# Altium PCB Layout.PcbDoc
Units mm, origin at the board's own origin, x right, y up, seen from the top; angles counter-clockwise.
Board outline 35.5 x 40.5 mm, 4 copper layers (Top Layer, Ground Layer, Power Layer, Bottom Layer), stack 1.591 mm thick; 58 components, 42 nets, 203 pads, 71 vias.
Unrouted connection lines stored in the file: 2.
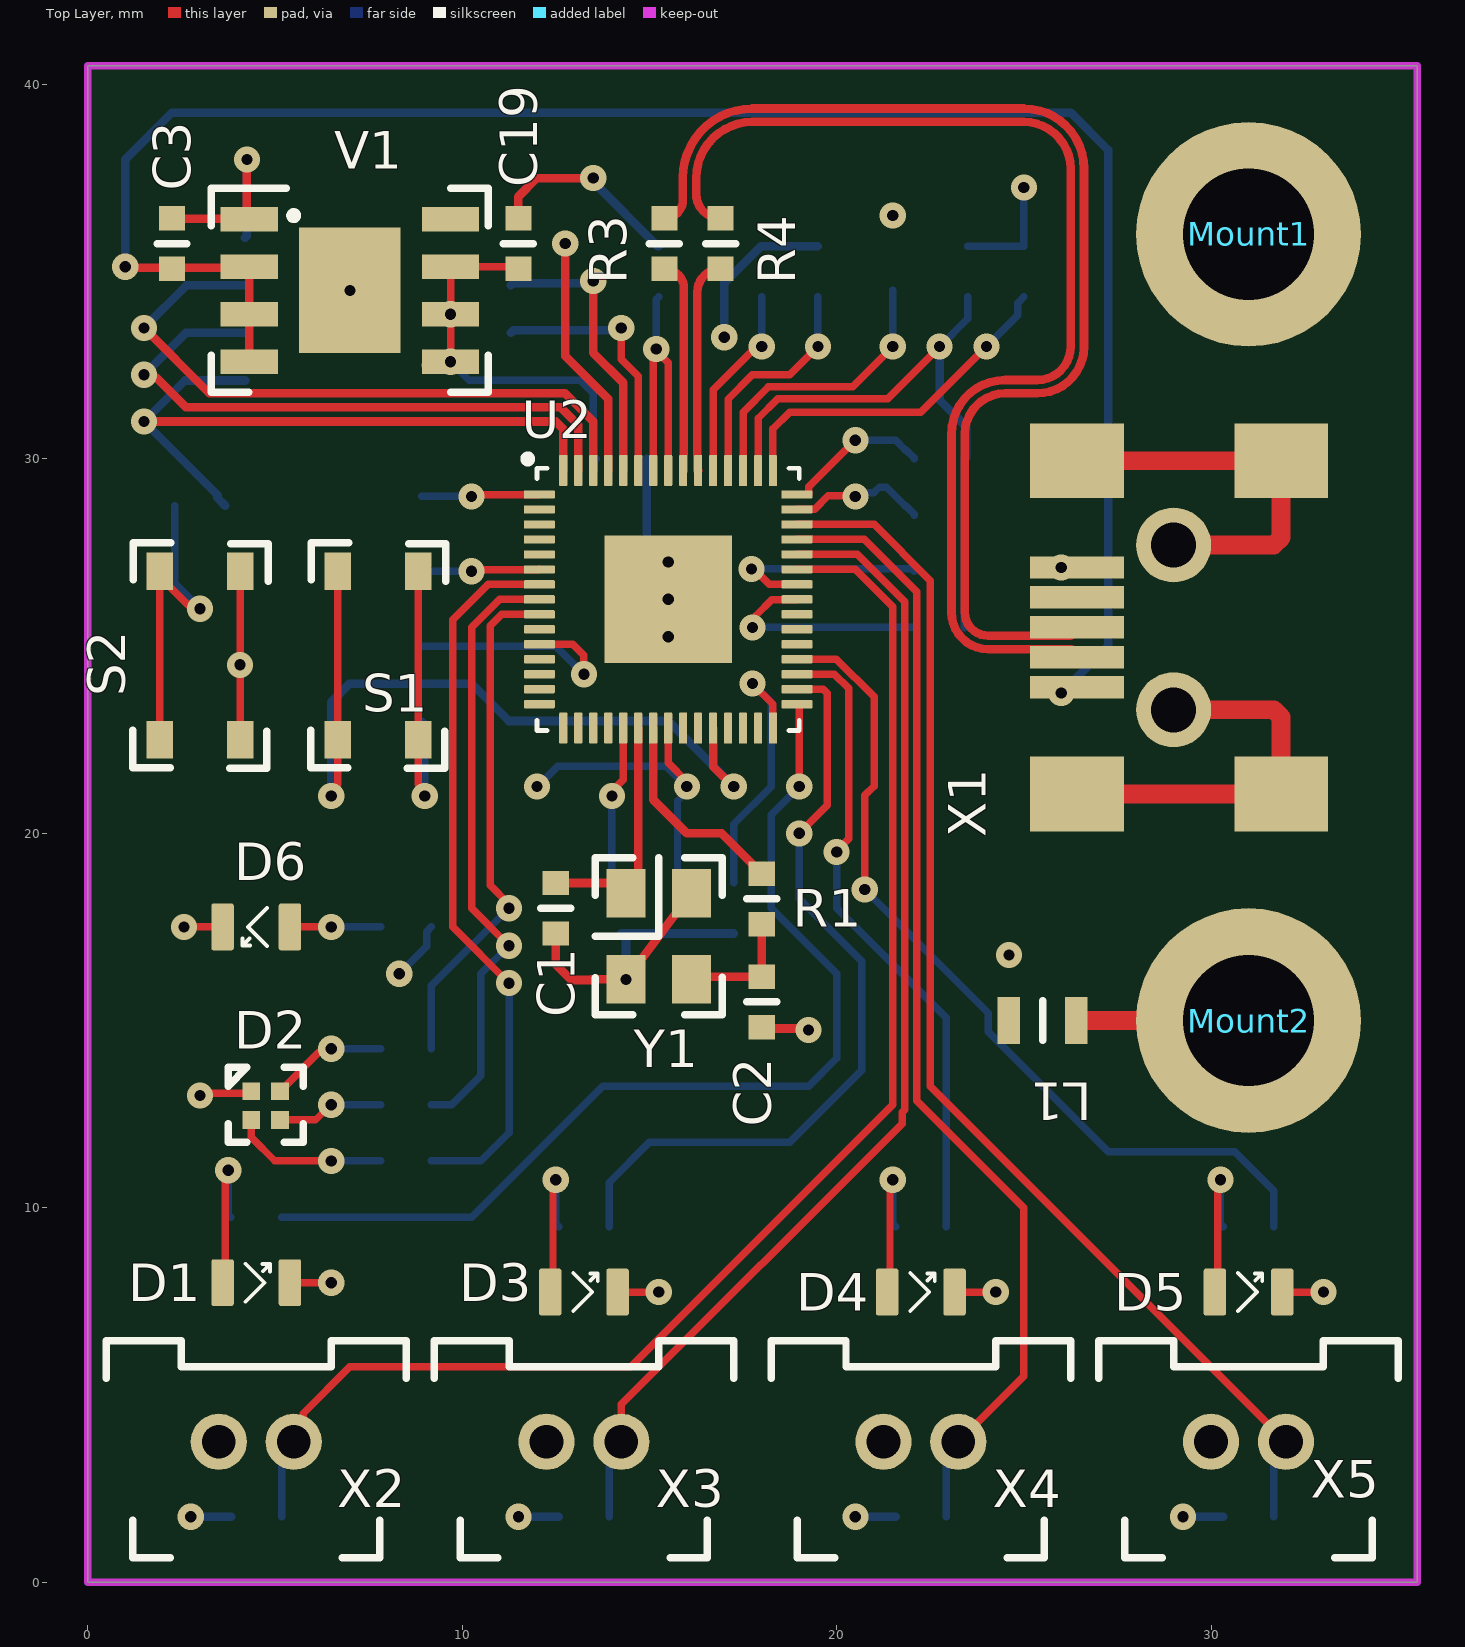
[diagram p0: Top Layer view]
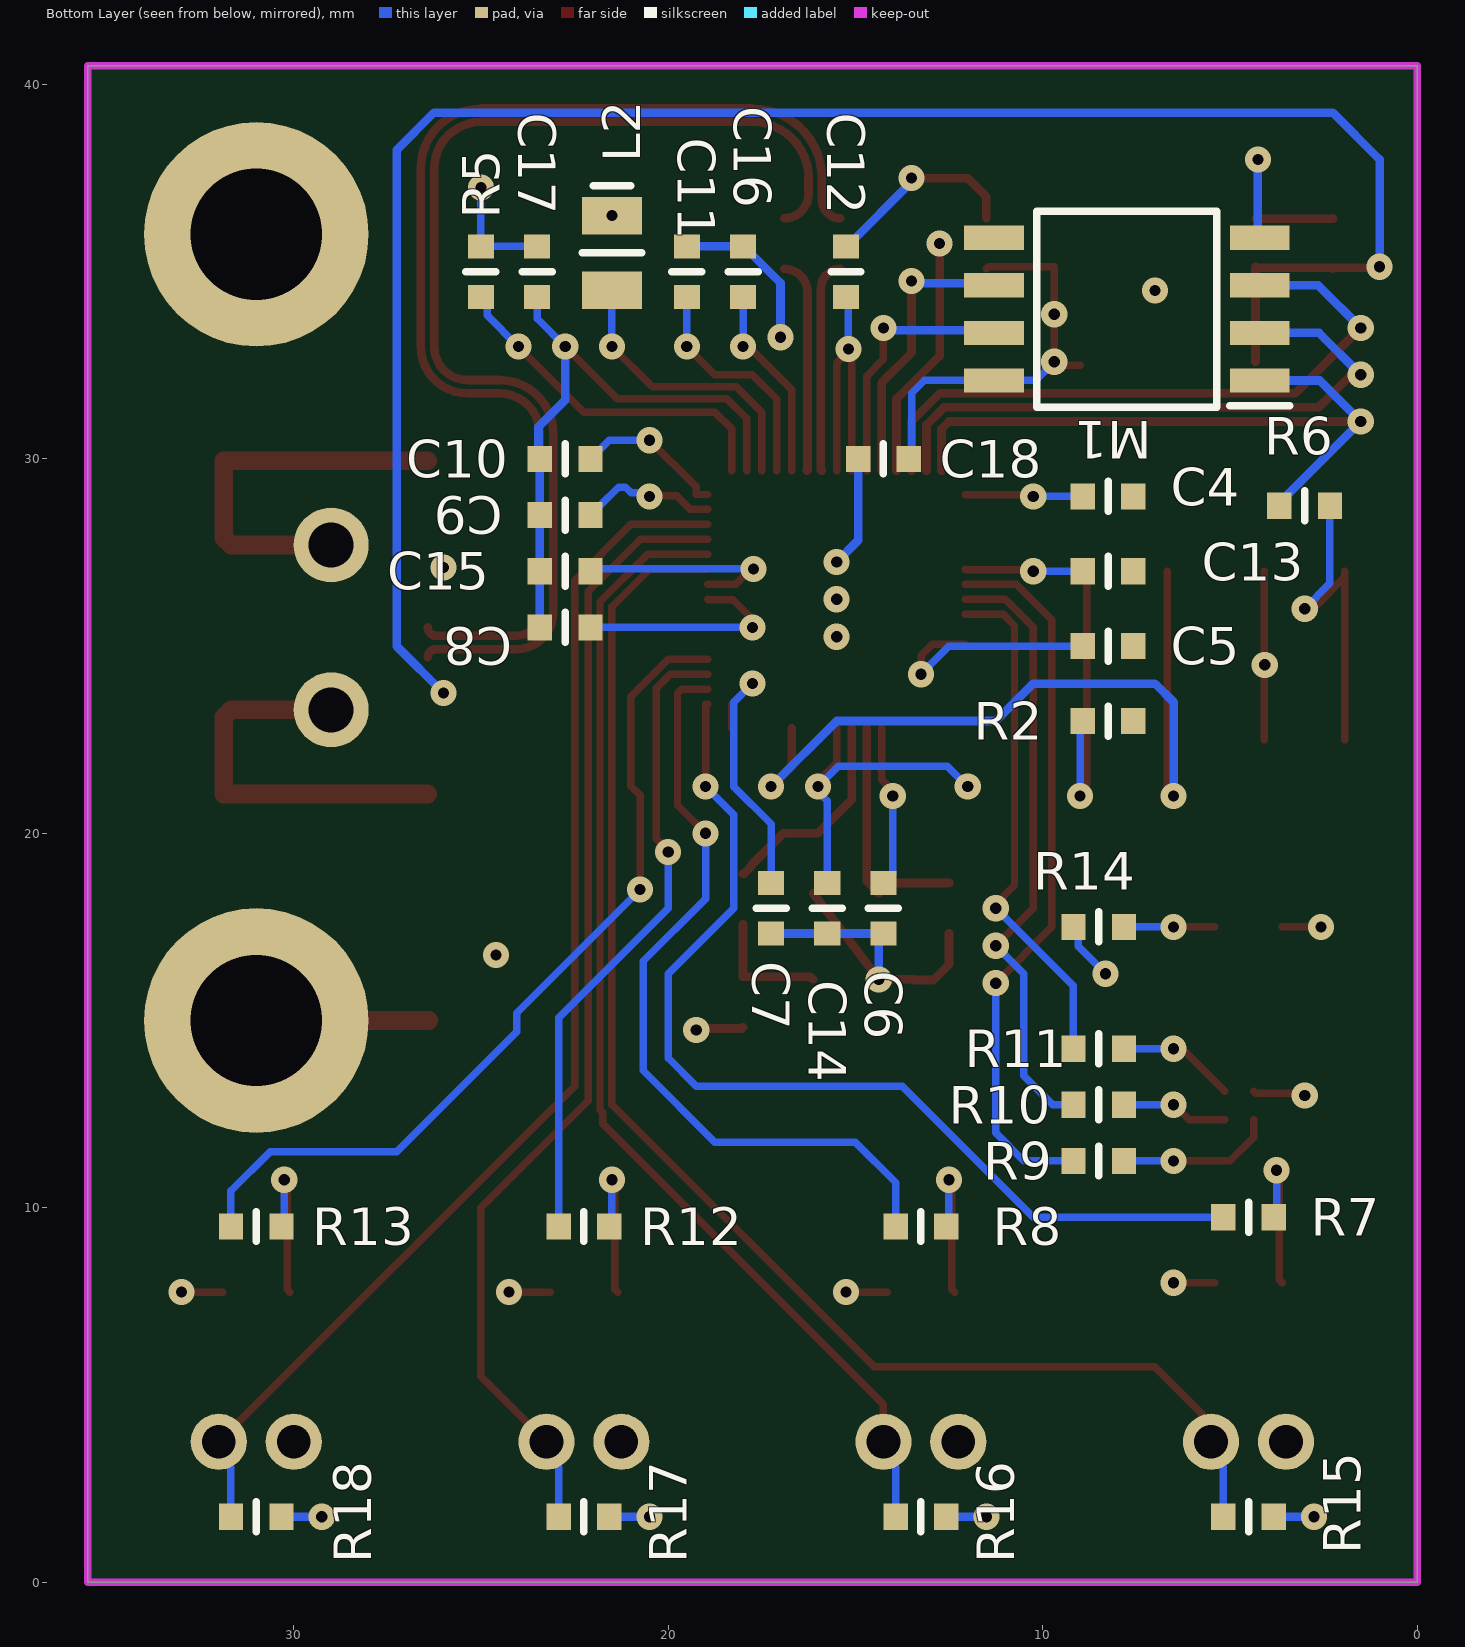
[diagram p1: Bottom Layer view, seen from below]
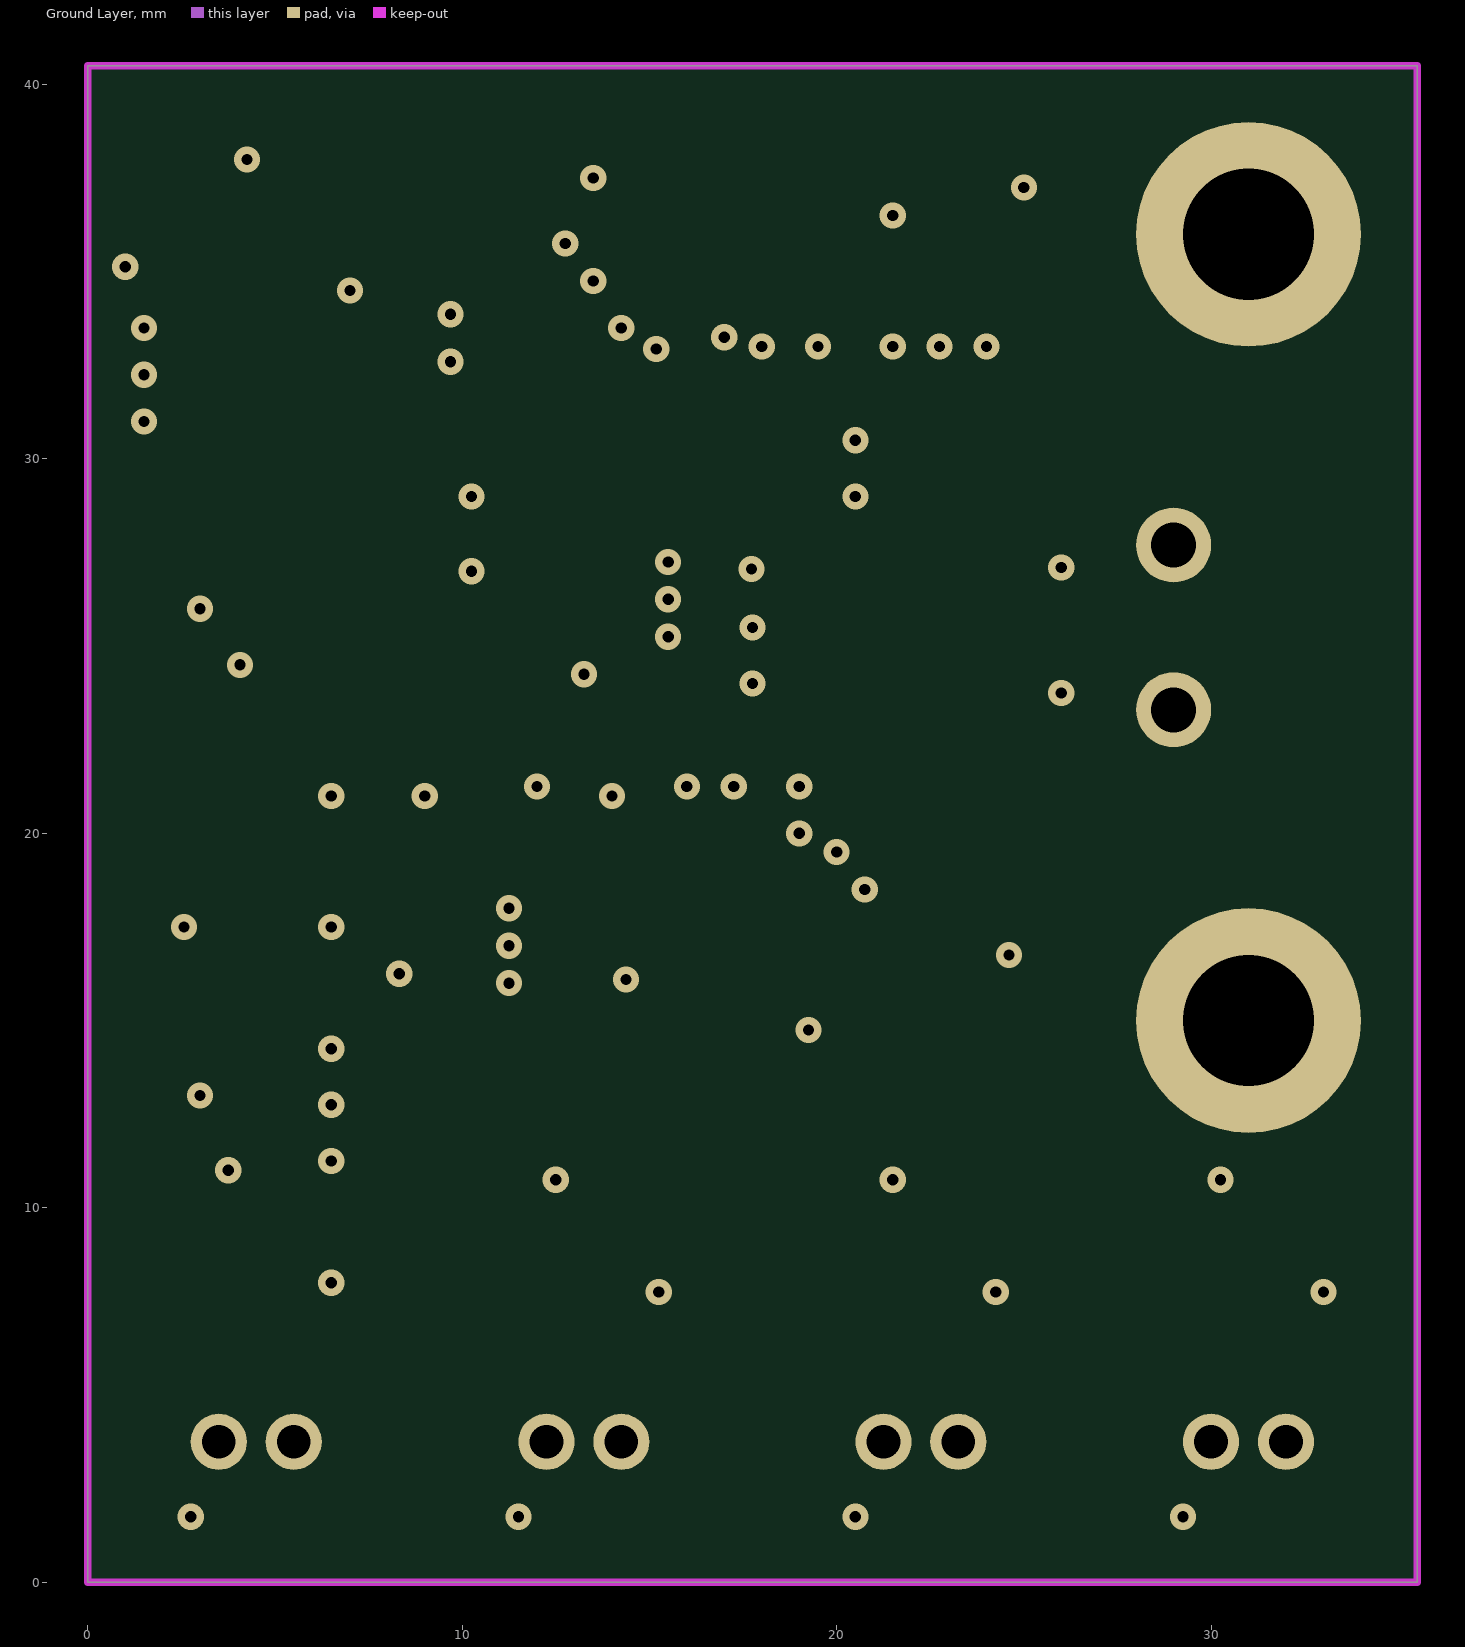
[diagram p2: Ground Layer]
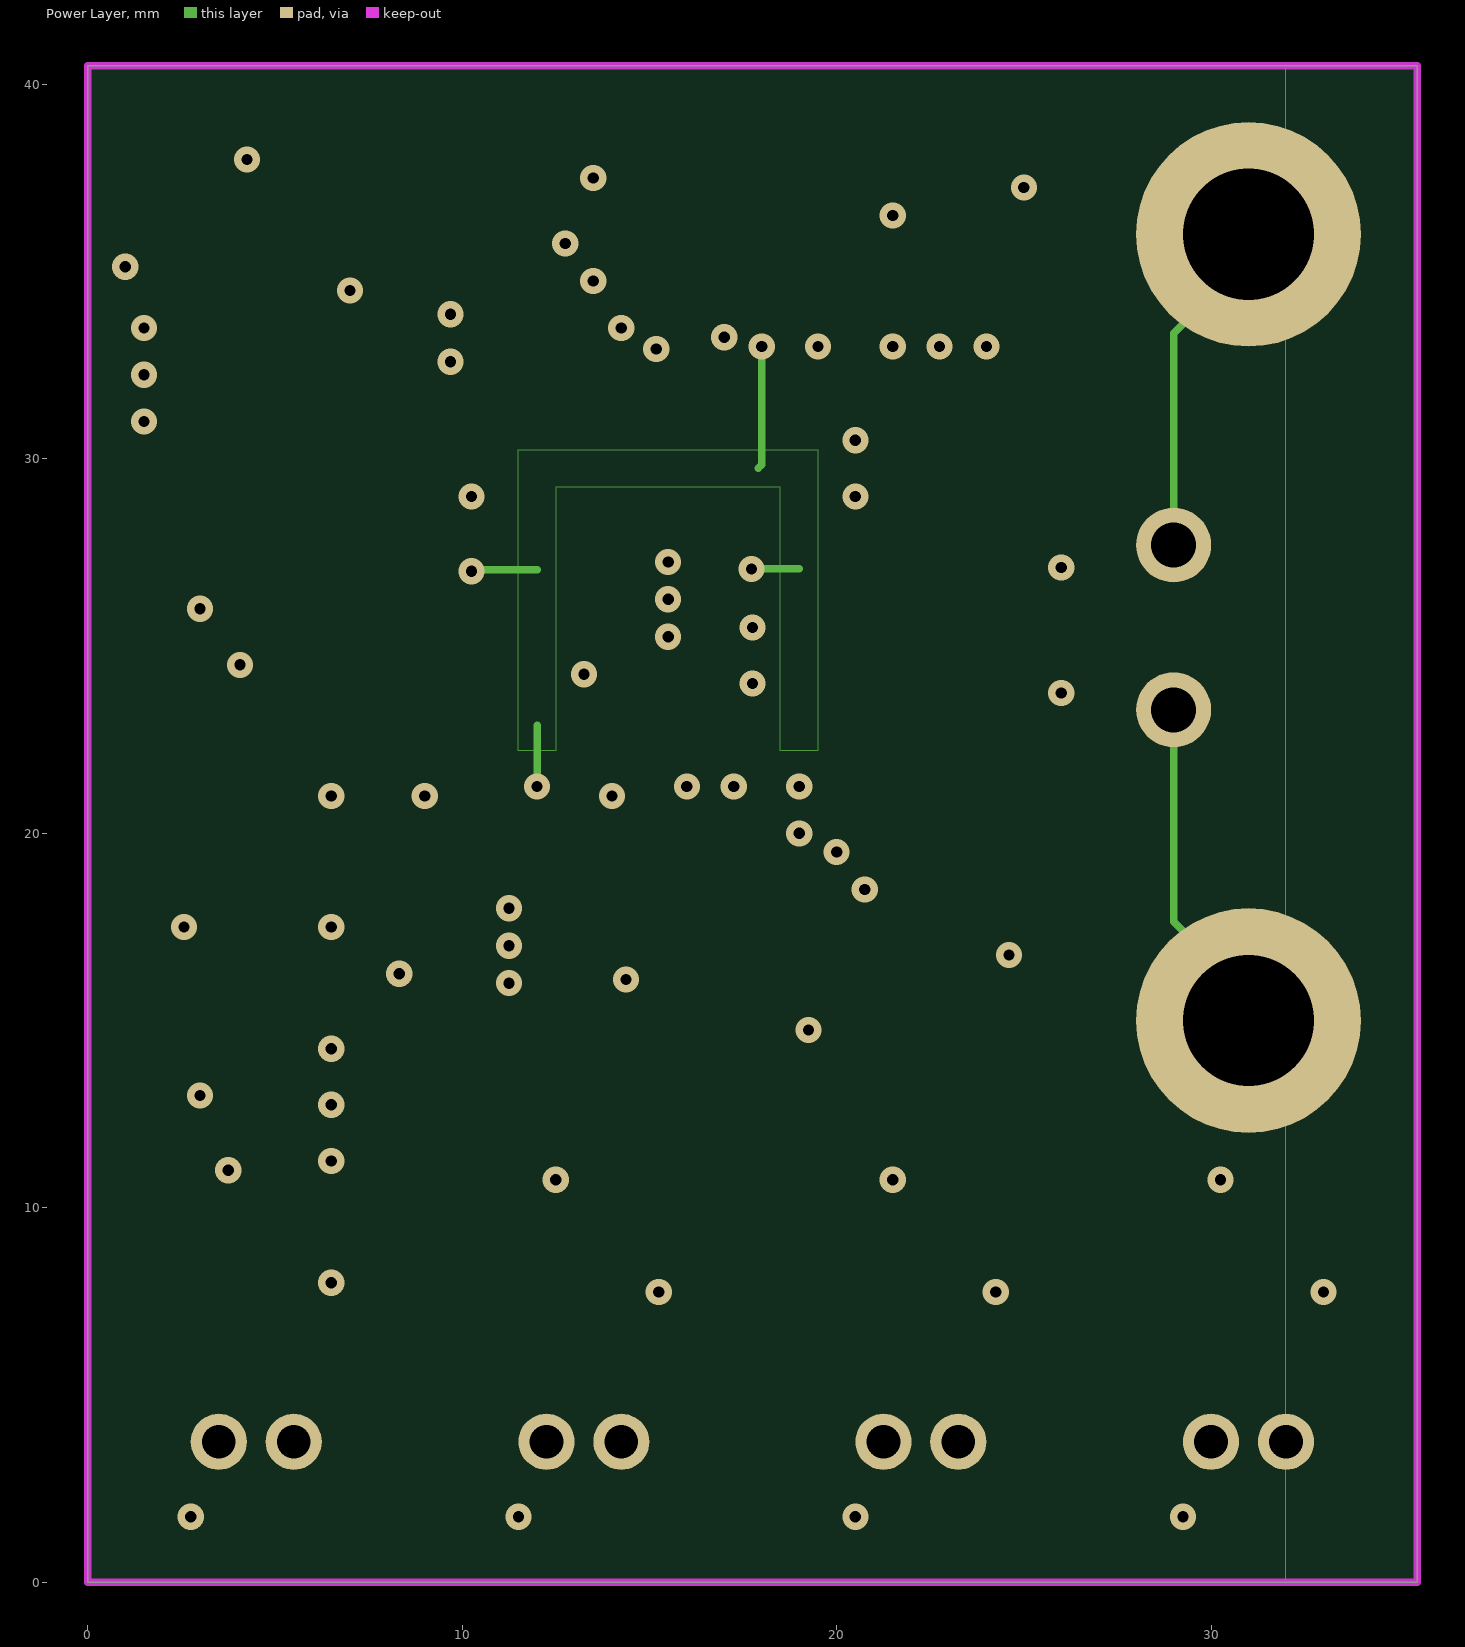
[diagram p3: Power Layer]
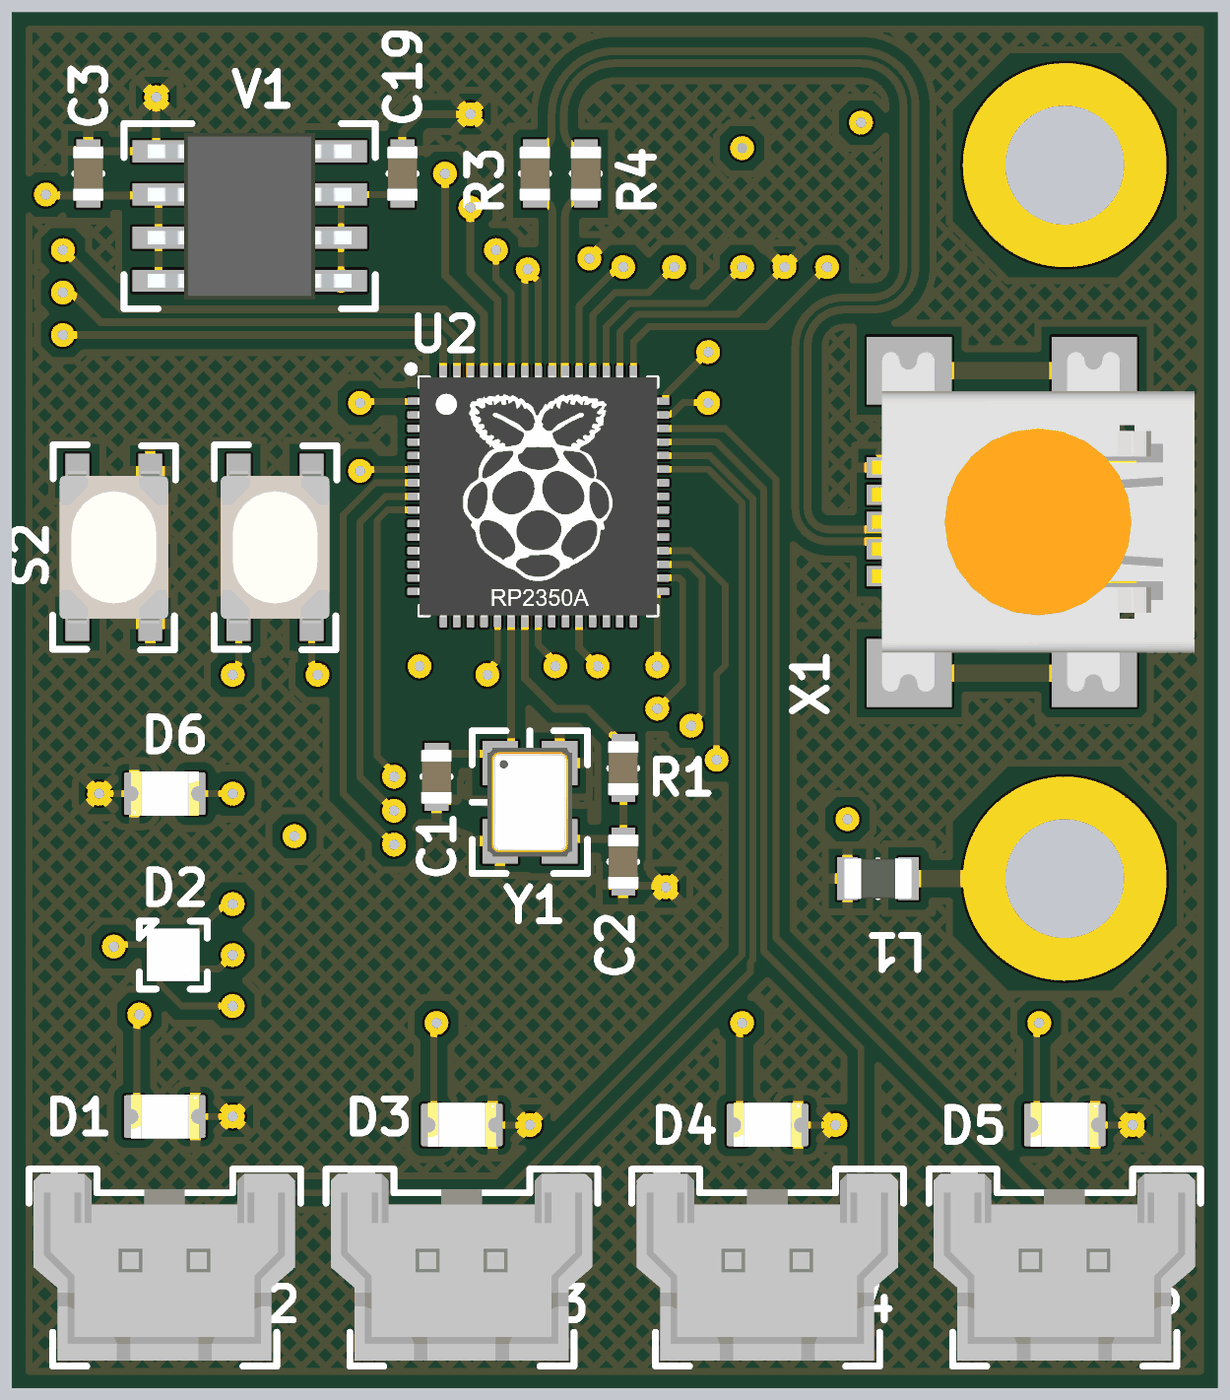
[diagram p4: 3D render of the assembled board from above, using the file's embedded part models]
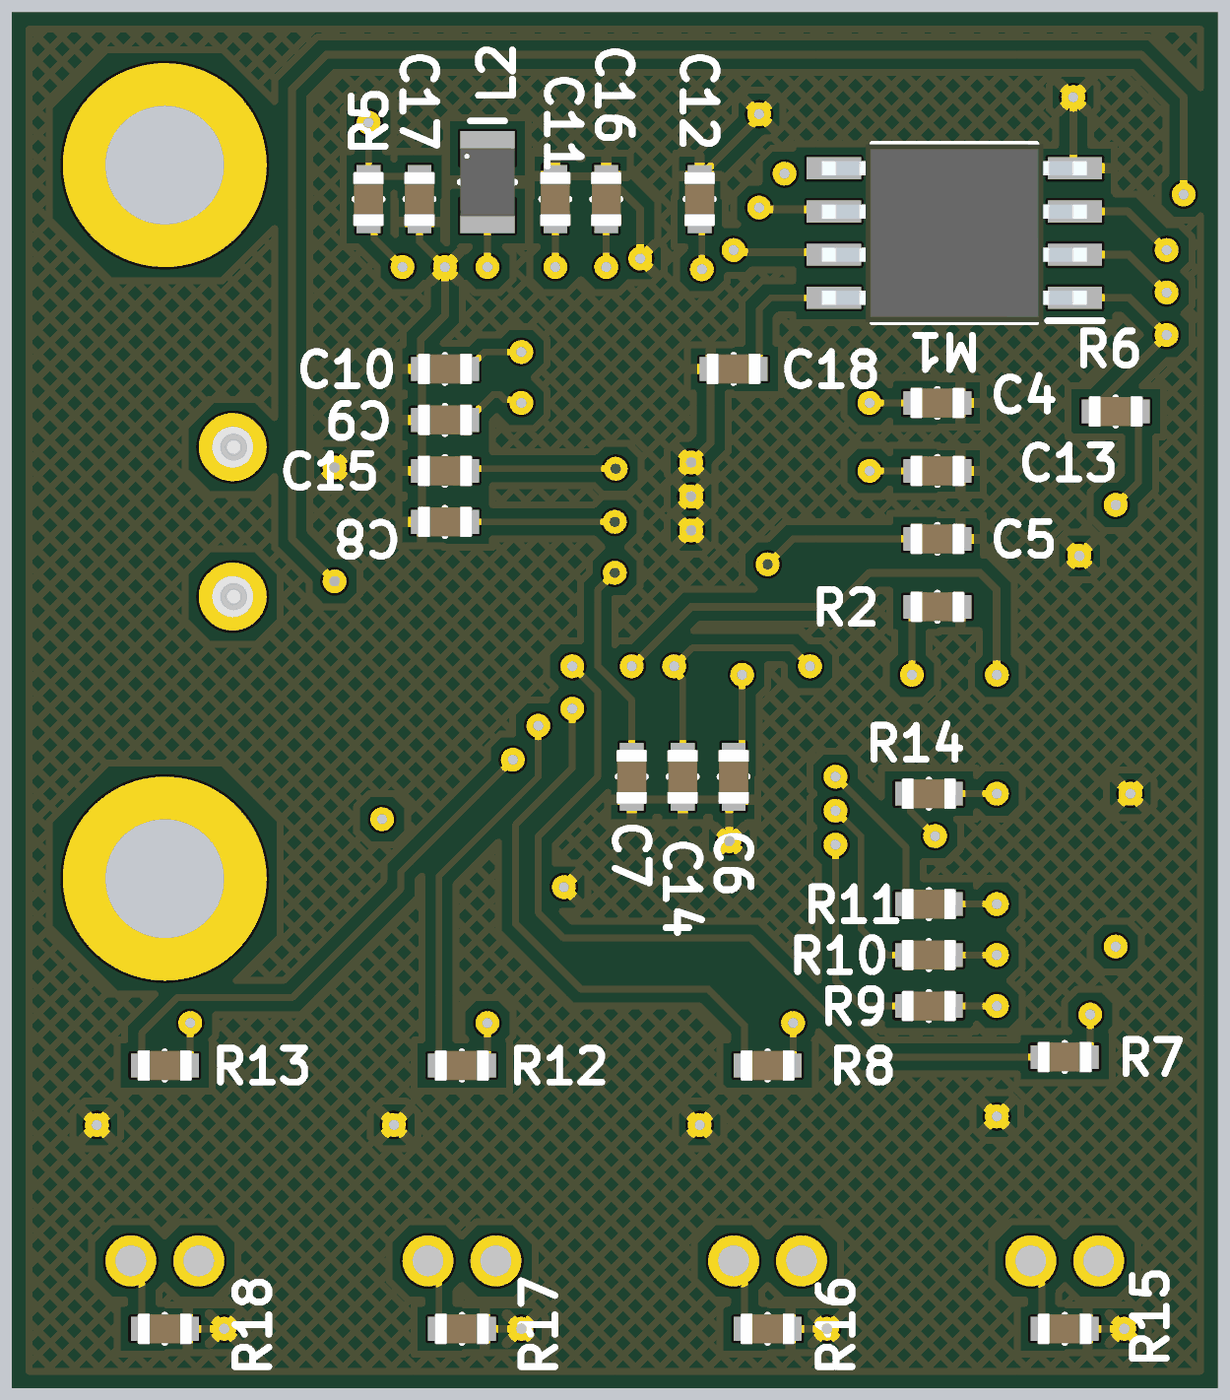
[diagram p5: 3D render of the assembled board from below, using the file's embedded part models]

## Layer stack, top to bottom
Top Solder: solder mask 0.0102, Solder Resist, Dk 3.8
Top Layer: signal copper 0.035
Dielectric 2: prepreg 0.2104, 7628*1, Dk 4.4
Ground Layer: signal copper 0.0175
Dielectric 1: dielectric 1.065, FR-4, Dk 4.8
Power Layer: signal copper 0.0175
Dielectric 3: prepreg 0.2104, 7628*1, Dk 4.4
Bottom Layer: signal copper 0.035
Bottom Solder: solder mask 0.0102, Solder Resist, Dk 3.8

## Board outline
0,0 35.5,0 35.5,40.5 0,40.5

## Design rules (kind name [scope] priority, off if disabled: settings)
BoardOutlineClearance [All] p1: gap=0.2 ignorepadtopadclearanceinfootprint=FALSE
Clearance "inPolygon Clearance" [InPolygon] p1: gap=0.3 ignorepadtopadclearanceinfootprint=TRUE // this rule ensures that every net within a polygon of a different net has a set clearance from the poly
Clearance "High Current Polygon Clearance" [(InPolygon AND InNetClass('High_Current_Nets'))] p2: gap=0 ignorepadtopadclearanceinfootprint=TRUE // this rule ensures that every net within a polygon of a different net has a set clearance from the poly
Clearance "Different Diff Pair" [All] p3: gap=0.2 ignorepadtopadclearanceinfootprint=TRUE
Clearance "Same Diff Pair" [All] p4: gap=0.1 ignorepadtopadclearanceinfootprint=TRUE
Clearance "Different Nets" [not InAnyDifferentialPair] p5: gap=0.3 ignorepadtopadclearanceinfootprint=TRUE except(0.1: Arc-SMDPad Arc-THPad Arc-Via Arc-Text Track-SMDPad Track-THPad Track-Via Track-Text SMDPad-Text THPad-Text Via-Text Fill-Text Poly-Text Region-Text Text-Text; 0.12: Arc-Arc Arc-Track Track-Track; 0.15: SMDPad-SMDPad SMDPad-THPad SMDPad-Via THPad-THPad THPad-Via Via-Via; 0.2: Arc-Hole Track-Hole SMDPad-Hole THPad-Hole Via-Hole Fill-Hole Poly-Hole Region-Hole Text-Hole)
Clearance "Same Net" [not InAnyDifferentialPair] p6: gap=0 ignorepadtopadclearanceinfootprint=TRUE except(0.1: THPad-Via; 0.18: Arc-Arc Arc-Track Track-Track)
ComponentClearance [All] p1: gap=0.102 collisioncheckmode=3 verticalgap=0.102 showdistances=TRUE
DiffPairsRouting "Ethernet Routing" [InDifferentialPairClass('Ethernet_Pairs')] p1: maxlimit=0.25 minlimit=0.2 mostfreqgap=0.25 toplayer_maxgap=0.2 toplayer_prefgap=0.2 toplayer_minwidth=0.25 toplayer_maxwidth=0.25 toplayer_prefwidth=0.25 midlayer1_mingap=0.25 midlayer1_minwidth=0.19 midlayer1_maxwidth=0.19 midlayer1_prefwidth=0.19 midlayer2_mingap=0.25 midlayer2_minwidth=0.19 midlayer2_maxwidth=0.19 midlayer2_prefwidth=0.19 bottomlayer_maxgap=0.2 bottomlayer_prefgap=0.2 bottomlayer_minwidth=0.25 bottomlayer_maxwidth=0.25 bottomlayer_prefwidth=0.25 impedanceprofiledriven=TRUE maxuncoupledlength=12.7
DiffPairsRouting "USB Routing" [InDifferentialPairClass('USB_Pairs')] p2: maxlimit=0.291 minlimit=0.127 mostfreqgap=0.291 toplayer_maxgap=0.127 toplayer_prefgap=0.127 toplayer_minwidth=0.23 toplayer_maxwidth=0.23 toplayer_prefwidth=0.23 midlayer1_mingap=0.291 midlayer1_minwidth=0.25 midlayer1_maxwidth=0.25 midlayer1_prefwidth=0.25 midlayer2_mingap=0.291 midlayer2_minwidth=0.25 midlayer2_maxwidth=0.25 midlayer2_prefwidth=0.25 bottomlayer_maxgap=0.127 bottomlayer_prefgap=0.127 bottomlayer_minwidth=0.23 bottomlayer_maxwidth=0.23 bottomlayer_prefwidth=0.23 maxuncoupledlength=12.7
DiffPairsRouting "CAN Routing" [InDifferentialPairClass('CAN_Pairs')] p3: maxlimit=0.907 minlimit=0.5 mostfreqgap=0.907 toplayer_maxgap=0.5 toplayer_prefgap=0.5 toplayer_minwidth=0.201 toplayer_maxwidth=0.201 toplayer_prefwidth=0.201 midlayer1_mingap=0.907 midlayer1_minwidth=0.155 midlayer1_maxwidth=0.155 midlayer1_prefwidth=0.155 midlayer2_mingap=0.907 midlayer2_minwidth=0.155 midlayer2_maxwidth=0.155 midlayer2_prefwidth=0.155 bottomlayer_maxgap=0.5 bottomlayer_prefgap=0.5 bottomlayer_minwidth=0.201 bottomlayer_maxwidth=0.201 bottomlayer_prefwidth=0.201 impedanceprofiledriven=TRUE maxuncoupledlength=12.7
Height [All] p1: minheight=0 maxheight=1816.048 prefheight=12.7
HoleSize [All] p1: absolutevalues=TRUE maxlimit=6.3 minlimit=0.3 maxpercent=80.000 minpercent=20.000
HoleToHoleClearance [All] p1: gap=0.25 allowstackedmicrovias=FALSE
MatchedLengths "XTAL Nets Matched Delays" [InNetClass('XTAL_Nets')] p1: tolerance=25.4 checknetsindiffpair=FALSE checkdiffpairvsdiffpair=TRUE checkxsignals=TRUE checkothers=TRUE usedelayunits=TRUE delaytolerance=10.000000
MatchedLengths "Diff Pair Matched Delays" [InDifferentialPairClass('Ethernet_Pairs') or InDifferentialPairClass('USB_Pairs') or InDifferentialPairClass('CAN_Pairs')] p2: tolerance=5 checknetsindiffpair=TRUE checkdiffpairvsdiffpair=FALSE checkxsignals=FALSE checkothers=FALSE usedelayunits=TRUE delaytolerance=100.000000 phasematching=TRUE phasedelaytolerance=5.000000 phasedistance=12.7
MinimumAnnularRing [All] p1: minimumring=0.2
MinimumSolderMaskSliver [All] p1: minsoldermaskwidth=0
PlaneClearance "Supply Net Clearance" [InNetClass('Supply_Nets')] p1: clearance=0.5
PlaneClearance "All Nets" [All] p2: clearance=0.3
PolygonConnect "High Current" [InNetClass('High_Current_Nets')] p1: thpad.connectstyle=Relief thpad.reliefconductorwidth=0.4 thpad.reliefentries=4 thpad.polygonreliefangle="90 Angle" thpad.airgapwidth=0.1 thpad.conductorbypadedge=TRUE thpad.mindistance=0.381 thpad.enablemindistance=FALSE smdpad.connectstyle=Direct smdpad.reliefconductorwidth=0.254 smdpad.reliefentries=4 smdpad.polygonreliefangle="90 Angle" smdpad.airgapwidth=0.254 via.connectstyle=Direct via.reliefconductorwidth=0.254 via.reliefentries=4 via.polygonreliefangle="90 Angle" via.airgapwidth=0.254
PolygonConnect "Supply Nets" [InNetClass('Supply_Nets')] p2: connectstyle=Relief reliefconductorwidth=0.3 reliefentries=4 polygonreliefangle="90 Angle" conductorbypadedge=TRUE mindistance=0.381 enablemindistance=FALSE airgapwidth=0.254
PolygonConnect General [All] p3: connectstyle=Relief reliefconductorwidth=0.254 reliefentries=4 polygonreliefangle="90 Angle" airgapwidth=0.254
RoutingVias [All] p1: holewidth=0.2 width=0.35 viastyle="Through Hole" minholewidth=0.15 minwidth=0.3 maxholewidth=6.3 maxwidth=6.55
SilkToSilkClearance [All] p1: silktosilkclearance=0
SilkToSolderMaskClearance [All] p1: minsilkscreentomaskgap=0 clearancetoexposedcopper=TRUE
SolderMaskExpansion [All] p1: expansion=0.075 istentingtop=FALSE
SupplyNets "Schematic Supply Nets_7" [InNet('+3V3')] p1: voltage=0.000
SupplyNets "Schematic Supply Nets_6" [InNet('+1V1')] p2: voltage=0.000
SupplyNets "Schematic Supply Nets_5" [InNet('RUN')] p3: voltage=0.000
SupplyNets "Schematic Supply Nets_4" [InNet('XIN')] p4: voltage=0.000
SupplyNets "Schematic Supply Nets_2" [InNet('+5V')] p5: voltage=0.000
SupplyNets "Schematic Supply Nets" [InNet('XOUT')] p6: voltage=0.000
SupplyNets "Schematic Supply Nets_3" [InNet('GND')] p7: voltage=0.000
SupplyNets "Schematic Supply Nets_1" [InNet('Earth')] p8: voltage=0.000
UnRoutedNet [All] p1: checkbadconnections=TRUE
Width "nRF Width" [InNetClass('nRF Signal')] p1: maxlimit=0.379 minlimit=0.263 preferedwidth=0.379 toplayer_minwidth=0.379 midlayer1_maxwidth=0.263 midlayer1_prefwidth=0.263 midlayer2_maxwidth=0.263 midlayer2_prefwidth=0.263 bottomlayer_minwidth=0.379 impedanceprofiledriven=TRUE minimp=50.000000 maximp=50.000000 favimp=50.000000 checkconnectedcopper=TRUE
Width [All] p2: maxlimit=100 minlimit=0.1 preferedwidth=0.2
20 further rules are at their usual default settings.

## Classes and differential pairs
differential pair class USB_Pairs: RP2350_D RP2350_DX
net class Supply_Nets: +3V3 +5V Earth GND
component class RP2350A: C1 C2 C3 C4 C5 C6 C7 C8 C9 C10 C11 C12 C13 C14 C15 C16 C17 C18 C19 L1 L2 M1 Mount1 Mount2 R1 R2 R3 R4 R5 R6 S1 S2 U1 U2 V1 X1 Y1
component class Peripherals: D1 D2 D3 D4 D5 D6 R7 R8 R9 R10 R11 R12 R13 R14 R15 R16 R17 R18 X2 X3 X4 X5
differential pair RP2350_DX: +RP2350_DX_P -RP2350_DX_N
differential pair RP2350_D: +RP2350_D_P -RP2350_D_N

## Components (designator, comment, footprint, x,y, rotation, side; value= is the part's Value field where it differs from the comment)
C1 "[Cap] 0603 15pF 1% 100V" "[Cap] SMD 0603" 12.5,18 r90 top
C2 "[Cap] 0603 15pF 1% 100V" "[Cap] SMD 0603" 18,15.5 r90 top
C3 "[Cap] 0603 10uF 10% 10V" "[Cap] SMD 0603" 2.25,35.75 r270 top
C4 "[Cap] 0603 0.1uF 10% 50V" "[Cap] SMD 0603" 8.25,29 r0 bottom
C5 "[Cap] 0603 0.1uF 10% 50V" "[Cap] SMD 0603" 8.25,25 r0 bottom
C6 "[Cap] 0603 0.1uF 10% 50V" "[Cap] SMD 0603" 14.25,18 r90 bottom
C7 "[Cap] 0603 0.1uF 10% 50V" "[Cap] SMD 0603" 17.25,18 r90 bottom
C8 "[Cap] 0603 0.1uF 10% 50V" "[Cap] SMD 0603" 22.75,25.5 r180 bottom
C9 "[Cap] 0603 0.1uF 10% 50V" "[Cap] SMD 0603" 22.75,28.5 r180 bottom
C10 "[Cap] 0603 0.1uF 10% 50V" "[Cap] SMD 0603" 22.75,30 r180 bottom
C11 "[Cap] 0603 0.1uF 10% 50V" "[Cap] SMD 0603" 19.5,35 r270 bottom
C12 "[Cap] 0603 4.7uF 10% 25V" "[Cap] SMD 0603" 15.25,35 r90 bottom
C13 "[Cap] 0603 0.1uF 10% 50V" "[Cap] SMD 0603" 8.25,27 r0 bottom
C14 "[Cap] 0603 0.1uF 10% 50V" "[Cap] SMD 0603" 15.75,18 r90 bottom
C15 "[Cap] 0603 4.7uF 10% 25V" "[Cap] SMD 0603" 22.75,27 r180 bottom
C16 "[Cap] 0603 4.7uF 10% 25V" "[Cap] SMD 0603" 18,35 r90 bottom
C17 "[Cap] 0603 4.7uF 10% 25V" "[Cap] SMD 0603" 23.5,35 r90 bottom
C18 "[Cap] 0603 0.1uF 10% 50V" "[Cap] SMD 0603" 14.25,30 r180 bottom
C19 "[Cap] 0603 10uF 10% 10V" "[Cap] SMD 0603" 11.5,35.75 r270 top
D1 "[LED] SMD 0805 Yellow" "[LED] SMD 0805" 4.5,8 r0 top
D2 "[LED] SMD RGB 1.55x1.55mm" "[LED] SMD RGB 1.55x1.55mm" 4.75,12.75 r0 top
D3 "[LED] SMD 0805 Yellow" "[LED] SMD 0805" 13.25,7.75 r0 top
D4 "[LED] SMD 0805 Yellow" "[LED] SMD 0805" 22.25,7.75 r0 top
D5 "[LED] SMD 0805 Yellow" "[LED] SMD 0805" 31,7.75 r0 top
D6 "[LED] SMD 0805 Green" "[LED] SMD 0805" 4.5,17.5 r180 top
L1 "652-MH2029-300Y" "[Ferrite] SMD 0805" 25.5,15 r180 top
L2 "[3.3uH] SMD 0806 2.1A" "[Inductor] SMD 0806" 21.5,35.5 r270 bottom
M1 "W25Q128JVSIM" "[Flash] 128MBit" 7.75,34 r0 bottom
Mount1 "M3 Mount Hole" "[Mount] M3 Mount Hole" 31,36 r0 top
Mount2 "M3 Mount Hole" "[Mount] M3 Mount Hole" 31,15 r0 top
R1 "[1k] SMD 0603 1% 1/10W" "[Res] SMD 0603" 18,18.25 r90 top
R2 "[1k] SMD 0603 1% 1/10W" "[Res] SMD 0603" 8.25,23 r0 bottom
R3 "[27] SMD 0603 1% 1/10W" "[Res] SMD 0603" 15.4,35.75 r270 top
R4 "[27] SMD 0603 1% 1/10W" "[Res] SMD 0603" 16.9,35.75 r270 top
R5 "[33] SMD 0603 0.5% 1/16W" "[Res] SMD 0603" 25,35 r270 bottom
R6 "[1k] SMD 0603 1% 1/10W" "[Res] SMD 0603" 3,28.75 r180 bottom
R7 "[220] SMD 0603 1% 1/10W" "[Res] SMD 0603" 4.5,9.75 r180 bottom
R8 "[220] SMD 0603 1% 1/10W" "[Res] SMD 0603" 13.25,9.5 r180 bottom
R9 "[220] SMD 0603 1% 1/10W" "[Res] SMD 0603" 8.5,11.25 r180 bottom
R10 "[220] SMD 0603 1% 1/10W" "[Res] SMD 0603" 8.5,12.75 r180 bottom
R11 "[220] SMD 0603 1% 1/10W" "[Res] SMD 0603" 8.5,14.25 r180 bottom
R12 "[220] SMD 0603 1% 1/10W" "[Res] SMD 0603" 22.25,9.5 r180 bottom
R13 "[220] SMD 0603 1% 1/10W" "[Res] SMD 0603" 31,9.5 r180 bottom
R14 "[220] SMD 0603 1% 1/10W" "[Res] SMD 0603" 8.5,17.5 r180 bottom
R15 "[10k] SMD 0603 1% 1/8W" "[Res] SMD 0603" 4.5,1.75 r0 bottom
R16 "[10k] SMD 0603 1% 1/8W" "[Res] SMD 0603" 13.25,1.75 r0 bottom
R17 "[10k] SMD 0603 1% 1/8W" "[Res] SMD 0603" 22.25,1.75 r0 bottom
R18 "[10k] SMD 0603 1% 1/8W" "[Res] SMD 0603" 31,1.75 r0 bottom
S1 "[SPST] SMD Pushbutton" "[SPST] SMD Pushbutton" 7.75,24.75 r90 top
S2 "[SPST] SMD Pushbutton" "[SPST] SMD Pushbutton" 3,24.75 r90 top
U2 "RP2350A" "[MCU] RP2350A" 15.5,26.25 r0 top
V1 "3V3 1.5A" "[Linear] 3V3 1.5A" 7,34.5 r0 top
X1 "[USB] Type-B Mini" "[USB] Type-B Mini" 30.25,25.5 r90 top
X2 "[Sherlock] 2pin" "[Sherlock] 2pin" 3.5,3.75 r0 top
X3 "[Sherlock] 2pin" "[Sherlock] 2pin" 12.25,3.75 r0 top
X4 "[Sherlock] 2pin" "[Sherlock] 2pin" 21.25,3.75 r0 top
X5 "[Sherlock] 2pin" "[Sherlock] 2pin" 30,3.75 r0 top
Y1 "XTAL 12MHz" "[Crystal] SMD 12MHz" 15.25,17.25 r270 top

## Footprints (in the part's own frame and the unit in brackets; to place one, negate y for a bottom-side part, rotate by r counter-clockwise, add the part's x,y. Pads: shape width x height; smd on the part's side, far side on the other; paste and mask are expansions set on the pad)
"[Cap] SMD 0603" [mm]
  rect 0.65x0.7 smd: 1(-0.675,0) 2(0.675,0)
  silkscreen extent 0,-0.4 0,0.4, body extent -0.8,-0.45 0.8,0.45, height 0.8
"[Crystal] SMD 12MHz" [mm]
  rect 1.3x1.05 smd: 1(-1.15,-0.875) 2(1.15,-0.875) 3(1.15,0.875) 4(-1.15,0.875)
  silkscreen extent -2.1,-1.7 2.1,1.7, body extent -1.6,-1.25 1.6,1.25, height 0.75
"[Ferrite] SMD 0805" [mm]
  rect 0.6x1.25 smd: 1(-0.9,0) 2(0.9,0)
  silkscreen extent 0,-0.53 0,0.53, body extent -1,-0.6 1,0.6, height 1.1
"[Flash] 128MBit" [mm] "W25Q128JVSIM"
  rect 1.6x0.65 smd: 1(-3.55,1.905) 2(-3.55,0.635) 3(-3.55,-0.635) 4(-3.55,-1.905) 5(3.55,-1.905) 6(3.55,-0.635) 7(3.55,0.635) 8(3.55,1.905)
  silkscreen extent -4.35,-2.61 2.4,2.62, body extent -3.9,-2.61 3.9,2.62, height 1.95
"[Inductor] SMD 0806" [mm]
  rect 1x1.6 smd: 1(-1,0) 2(1,0)
  silkscreen extent -1.8,-0.8 0,0.8, body extent -1,-0.8 1,0.8, height 1
"[LED] SMD 0805" [mm]
  rrect20% 0.6x1.25 smd: 1(-0.9,0) 2(0.9,0)
  silkscreen extent -0.28,-0.51 0.37,0.51, body extent -1,-0.65 1,0.65, height 0.8
"[LED] SMD RGB 1.55x1.55mm" [mm] "LTST-E143EGBW-P1"
  rect 0.47x0.47 smd: 1(-0.385,-0.405) 2(-0.385,0.365) 3(0.385,0.365) 4(0.385,-0.405)
  silkscreen extent -1,-1 1,1, body extent -0.77,-0.77 0.77,0.78, height 0.27
"[Linear] 3V3 1.5A" [mm]
  rect 1.525x0.65 smd: 1(-2.688,1.905) 2(-2.688,0.635) 3(-2.688,-0.635) 4(-2.688,-1.905) 5(2.688,-1.905) 6(2.688,-0.635) 7(2.688,0.635) 8(2.688,1.905)
  rect 2.71x3.35 smd: 9(0,0)
  silkscreen extent -3.7,-2.73 3.7,2.73, body extent -3,-2.45 3,2.45, height 1.5
"[MCU] RP2350A" [mm]
  rrect25% 0.83x0.22 smd: 1(-3.44,2.8) 2(-3.44,2.4) 3(-3.44,2) 4(-3.44,1.6) 5(-3.44,1.2) 6(-3.44,0.8) 7(-3.44,0.4) 8(-3.44,0) 9(-3.44,-0.4) 10(-3.44,-0.8) 11(-3.44,-1.2) 12(-3.44,-1.6) 13(-3.44,-2) 14(-3.44,-2.4) 15(-3.44,-2.8) 31(3.44,-2.8) 32(3.44,-2.4) 33(3.44,-2) 34(3.44,-1.6) 35(3.44,-1.2) 36(3.44,-0.8) 37(3.44,-0.4) 38(3.44,0) 39(3.44,0.4) 40(3.44,0.8) 41(3.44,1.2) 42(3.44,1.6) 43(3.44,2) 44(3.44,2.4) 45(3.44,2.8)
  rrect25% 0.22x0.83 smd: 16(-2.8,-3.44) 17(-2.4,-3.44) 18(-2,-3.44) 19(-1.6,-3.44) 20(-1.2,-3.44) 21(-0.8,-3.44) 22(-0.4,-3.44) 23(0,-3.44) 24(0.4,-3.44) 25(0.8,-3.44) 26(1.2,-3.44) 27(1.6,-3.44) 28(2,-3.44) 29(2.4,-3.44) 30(2.8,-3.44) 46(2.8,3.44) 47(2.4,3.44) 48(2,3.44) 49(1.6,3.44) 50(1.2,3.44) 51(0.8,3.44) 52(0.4,3.44) 53(0,3.44) 54(-0.4,3.44) 55(-0.8,3.44) 56(-1.2,3.44) 57(-1.6,3.44) 58(-2,3.44) 59(-2.4,3.44) 60(-2.8,3.44)
  rect 3.4x3.4 smd paste-4: 61(0,0)
  silkscreen extent -3.85,-3.5 3.5,3.85, body extent -3.55,-3.55 3.55,3.55, height 0.96
"[Mount] M3 Mount Hole" [mm]
  round 6 hole 3.5: 1(0,0)
"[Res] SMD 0603" [mm]
  rect 0.65x0.7 smd: 1(-0.675,0) 2(0.675,0)
  silkscreen extent 0,-0.4 0,0.4, body extent -0.8,-0.45 0.8,0.45, height 0.8
"[Sherlock] 2pin" [mm]
  round 1.5 hole 0.9: 1(0,0) 2(2,0)
  silkscreen extent -3,-3.1 5,2.7, body extent -2.86,-2.94 4.84,2.61, height 8.5
"[SPST] SMD Pushbutton" [mm] "PTS815SJM250SMTRLFS"
  rect 1x0.7 smd: 1(-2.25,1.075) 1(2.25,1.075) 2(-2.25,-1.075) 2(2.25,-1.075)
  silkscreen extent -3.02,-1.82 3.02,1.8, body extent -2.25,-1.6 2.25,1.6, height 2.5
"[USB] Type-B Mini" [mm] "MUSB-05-S-B-SM-A-K-TR"
  rect 0.6x2.5 smd: 1(-1.6,3.83) 2(-0.8,3.83) 3(0,3.83) 4(0.8,3.83) 5(1.6,3.83)
  rect 2x2.5 smd: MH(-4.45,-1.62) MH(-4.45,3.83) MH(4.45,-1.62) MH(4.45,3.83)
  round 2 hole 1.2: MH(-2.2,1.25) MH(2.2,1.25)
  body extent -5,-4.57 5,4.93, height 4.12

## Part data
C1 C2: "GCM1885C2A150FA16D", Capacitance=15pF, Max Voltage=100V, Size Package=0603, Supplier Part Number 1=490-16416-1-ND, Tolerance=1%, Supplier 1=DigiKey
C3 C19: "CL10A106KP8NNNC", Capacitance=10uF, Max Voltage=10V, Size Package=0603, Supplier Part Number 1=1276-1192-6-ND, Tolerance=10%, Supplier 1=DigiKey
C4 C5 C6 C7 C8 C9 C10 C11 C13 C14 C18: "CL10B104KB8NNNC", Capacitance=100nF, Max Voltage=50V, Size Package=0603, Supplier Part Number 1=1276-1000-6-ND, Tolerance=10%, Supplier 1=DigiKey
C12 C15 C16 C17: "GRM188R61E475KE11D", Capacitance=4.7uF, Max Voltage=25V, Size Package=0603, Supplier Part Number 1=490-7203-6-ND, Tolerance=10%, Supplier 1=DigiKey
D1 D3 D4 D5: "LY R976-PS-36-0-20-R18", Color=Yellow, Size Package=0805, Supplier Part Number 1=475-LYR976-PS-36-0-20-R18CT-ND, Supplier 1=DigiKey
D2: "LTST-E143EGBW-P1", Supplier Part Number 1=160-LTST-E143EGBW-P1CT-ND, Supplier 1=DigiKey
D6: "LG R971-KN-1-0-20-R18", Color=Green, Size Package=0805, Supplier Part Number 1=475-LGR971-KN-1CT-ND, Supplier 1=DigiKey
L1: library part "[Ferrite] SMD 0805 3A 30ohm", Res @ Freq="30 @ 100MHz", Size Package=0805, Supplier Part Number 1=MH2029-300YCT-ND, Supplier 1=DigiKey
L2: "AOTA-B201610S3R3-101-T", Inductance=3.3uH, Package=0806, Supplier Part Number 1=535-AOTA-B201610S3R3-101-TCT-ND, Supplier 1=DigiKey
M1: library part "[Flash] 128MBit", Supplier Part Number 1=W25Q128JVSIM-ND, Supplier 1=DigiKey
Mount1 Mount2: library part "[Mount] M3 Mount Hole", "Place at least 4.5mm from board edge. Plated."
R1 R2 R6: "RMCF0603FT1K00", Resistance=1k, Size Package=0603, Supplier Part Number 1=RMCF0603FT1K00DKR-ND, Tolerance=1%, Supplier 1=DigiKey, Wattage=1/10W
R3 R4: "MCT06030C2709FP500", Resistance=27, Size Package=0603, Supplier Part Number 1=749-1631-1-ND, Tolerance=1%, Supplier 1=DigiKey, Wattage=1/10W
R5: "RR0816Q-330-D", Resistance=33, Size Package=0603, Supplier Part Number 1=RR08Q33DDKR-ND, Tolerance=0.5%, Supplier 1=DigiKey, Wattage=1/16W
R7 R8 R9 R10 R11 R12 R13 R14: "CRGCQ0805F220R", Resistance=220, Size Package=0603, Supplier Part Number 1=A129741CT-ND, Tolerance=1%, Supplier 1=DigiKey, Wattage=1/8W
R15 R16 R17 R18: "RMCF0603FT10K0", Resistance=10k, Size Package=0603, Supplier Part Number 1=RMCF0603FT10K0DKR-ND, Tolerance=1%, Supplier 1=DigiKey, Wattage=1/10W
S1 S2: "PTS815SJM250SMTRLFS", Supplier Part Number 1=CKN12215-6-ND, Supplier 1=DigiKey
U2: library part "[MCU] RP2350A", "QFN-60 Package", Supplier Part Number 1=2648-SC1509-A4CT-ND, Supplier 1=DigiKey
V1: library part "[Linear] SMD 3V3 1.5A", "AP7362A-33SP-13", Supplier Part Number 1=AP7362A-33SP-13DICT-ND, Supplier 1=DigiKey
X1: "MUSB-05-S-B-SM-A-K-TR", Supplier Part Number 1=SAM14226CT-ND, Supplier 1=DigiKey
X2 X3 X4 X5: "0353620250", Supplier Part Number 1=WM18920-ND, Supplier 1=DigiKey
Y1: library part "[Crystal] SMD 12MHz", "815-ABM8-272-T3", Supplier Part Number 1=535-ABM8-272-T3CT-ND, Supplier 1=DigiKey

## Via types
v1: diameter 0.7, hole 0.3, Top Layer to Bottom Layer, 71 vias

## Nets (pads, with @x,y where several pads share a name; then routed paths per layer and width w, separated by ;. In a path a pad name is that pad's centre, name@x,y a point inside that pad or via, vN(x,y) a via of type N, cw(c..) or ccw(c..) an arc to the next point about the centre after c; other vN are vias at no path point)
+1V1: C13.2 C14.2 C15.2 C16.1 L2.1 U2.6 U2.23 U2.39 U2.50 | length 30.9
  Top Layer w0.2: v1(10.25,27) 10.29,27.04 12.05,27.04 U2.6 ; U2.23 15.5,21.885 16,21.385 v1(16,21.25) ; U2.50 16.7,31.85 v1@17.85,33 ; v1(17.723,27.064) 17.786,27.064 18.2,26.65 U2.39
  Power Layer w0.2: v1(10.25,27) 10.29,27.04 12,27.04 ; v1(12,21.25) 12,22.885 ; v1(17.723,27.064) 19,27.064 ; 17.9,29.75 18,29.85 v1(18,33)
  Bottom Layer w0.2: C13.2 v1(10.25,27) ; v1(12,21.25) 12.548,21.798 15.452,21.798 v1(16,21.25) 16,21.115 15.75,20.865 C14.2 ; v1(17.723,27.064) 22.011,27.064 C15.2 ; v1(18,33) C16.1
  other v1: 21.5,36.5
+3V3: C4.2 C5.2 C6.2 C7.2 C8.2 C9.2 C10.2 C11.2 C12.1 C17.2 C18.2 C19.2 D2.2 M1.8 R5.1 R14.1 U2.1 U2.11 U2.20 U2.30 U2.38 U2.44 U2.45 U2.49 U2.53 U2.54 V1.5 V1.6 V1.7 X2.1 X3.1 X4.1 X5.1 | length 66.5
  Top Layer w0.2: v1(3,13) 3.058,13.058 4.307,13.058 D2.2 ; V1.5@9,32.5 9.593,32.5 v1(9.688,32.595) v1(9.688,33.865) V1.7 11.44,35.135 C19.2 ; v1(10.25,29) 10.29,29.04 12.05,29.04 U2.1 ; U2.11@12.05,25.04 U2.11 12.95,25.05 13.245,24.755 13.245,24.255 v1(13.25,24.25) ; v1(14,21) 14,21.135 14.3,21.435 U2.20 ; U2.54 15.1,32.85 v1(15.185,32.935) 15.185,32.889 15.5,32.574 U2.53 ; U2.49 17.1,31.6 17.75,32.25 18.75,32.25 v1(19.5,33) ; v1(17.75,24) 18.3,23.45 U2.30 ; v1(17.75,25.5) 17.846,25.596 17.846,25.818 18.268,26.24 18.93,26.24 U2.38 ; U2.44 18.95,28.66 19.41,28.66 19.77,29.02 20.48,29.02 v1(20.5,29) ; U2.45 19.245,29.05 19.255,29.06 19.255,29.255 v1(20.5,30.5)
  Bottom Layer w0.2: v1(8.318,16.25) 9.049,16.981 9.049,17.374 R14.1 ; C5.2 12.5,25 v1(13.25,24.25) ; C4.2 v1(10.25,29) ; v1(9.688,32.595) 10.188,32.095 M1.8 13.155,32.095 13.5,31.75 13.5,30.075 C18.2 ; v1(14,21) 14,18.9 14.225,18.675 C6.2 ; v1(15.185,32.935) 15.185,34.26 C12.1 ; C7.2 17.25,20.25 18.25,21.25 18.25,23.5 v1(17.75,24) ; v1(17.75,25.5) C8.2 ; v1(19.5,33) C11.2 ; v1(20.5,29) 20.596,29.096 20.991,29.096 21.145,29.25 21.325,29.25 21.825,28.75 21.85,28.75 22.075,28.525 C9.2 ; v1(20.5,30.5) 21.575,30.5 21.825,30.25 21.85,30.25 22.075,30.025 C10.2 ; C17.2 R5.1 v1(25,37.25)
+5V: C3.2 V1.2 V1.3 V1.4 X1.1 | length 51
  Top Layer w0.23: v1(1,35.135) 1.03,35.105 2.22,35.105 C3.2 2.28,35.105 4.282,35.105 V1.2 V1.3 V1.4
  Bottom Layer w0.23: v1(1,35.135) 1,38 2.25,39.25 26.25,39.25 27.25,38.25 27.25,25 v1(26,23.75)
Earth: L1.1 Mount1.1 Mount2.1 X1.MH | length 43.8
  Top Layer w0.5: L1.1 Mount2.1 ; X1.MH@26.42,21.05 31.87,21.05 31.87,23.101 31.671,23.3 X1.MH@29,23.3 ; X1.MH@26.42,29.95 31.87,29.95 31.87,27.899 31.671,27.7 X1.MH@29,27.7
  Power Layer w0.2: X1.MH@29,23.3 29,17.639 31,15.639 Mount2.1 ; X1.MH@29,27.7 29,33.361 31,35.361 Mount1.1
GND: C1.1 C2.1 C3.1 C4.1 C5.1 C6.1 C7.1 C8.1 C9.1 C10.1 C11.1 C12.2 C13.1 C14.1 C15.1 C16.2 C17.1 C18.1 C19.1 D1.2 D3.2 D4.2 D5.2 D6.2 L1.2 M1.4 R2.1 R15.1 R16.1 R17.1 R18.1 S2.2 U2.47 U2.61 V1.1 V1.9 X1.5 Y1.2 Y1.4 | length 60.5
  Top Layer w0.2: v1(2.568,17.5) D6.2 ; S2.2@4.075,22.5 S2.2@4.075,27 ; D1.2 v1(6.5,8) ; D3.2 v1(15.25,7.75) ; U2.47 17.9,31.08 18.43,31.61 21.36,31.61 v1(22.75,33) ; D4.2 v1(24.25,7.75) ; D5.2 v1(33,7.75)
  Top Layer w0.23: C3.1@2.24,36.415 C3.1 2.26,36.415 4.302,36.415 4.25,36.467 v1(4.25,38) ; C19.1 11.5,37 12,37.5 v1(13.5,37.5) ; C1.1 12.5,16.5 12.915,16.085 13.433,16.085 13.448,16.1 v1(14.375,16.1) 14.785,16.635 15.716,17.866 Y1.4 ; C2.1 18.037,14.788 19.212,14.788 v1(19.25,14.75)
  Bottom Layer w0.2: v1(22.75,33) 23.5,33.75 C17.1
  Bottom Layer w0.23: v1(2.75,1.75) R15.1 ; M1.4 4.25,35.955 v1(4.25,38) ; v1(11.5,1.75) R16.1 ; v1(13.5,37.5) 13.5,37.4 15.225,35.675 C12.2 ; v1(14.375,16.1) 14.375,17.2 C6.1 C14.1 C7.1 ; C18.1 14.925,27.825 v1(15.5,27.25) ; v1(17,33.25) 17,34.7 17.975,35.675 C16.2 C11.1 ; v1(20.5,1.75) R17.1 ; v1(22.75,33) 22.75,31.575 23.462,30.863 23.462,30.038 C10.1 C9.1 C15.1 C8.1 ; v1(29.25,1.75) R18.1
  other v1: 4.068,24.5 15.5,25.25 15.5,26.25 26,27.1 7,34.5
LED0: R7.1 U2.31 | length 27.1
  Top Layer w0.2: U2.31 18.99,23.45 19,23.44 v1(19,21.25)
  Bottom Layer w0.2: R7.1 10.25,9.75 13.75,13.25 19.25,13.25 20,14 20,16.25 18.25,18 18.25,20.5 v1(19,21.25)
LED1: R8.1 U2.32 | length 21.1
  Top Layer w0.2: U2.32 19.639,23.85 19.75,23.739 19.75,20.75 v1(19,20)
  Bottom Layer w0.2: R8.1 13.925,10.675 15,11.75 18.75,11.75 20.671,13.671 20.671,16.579 19,18.25 v1(19,20)
LED2: R12.1 U2.33 | length 17.3
  Top Layer w0.2: U2.33 19.941,24.25 20.32,23.871 20.32,19.861 20,19.541 v1(20,19.5)
  Bottom Layer w0.2: v1(20,19.5) 20,18 22.925,15.075 R12.1
LED3: R13.1 U2.34 | length 23.2
  Top Layer w0.2: U2.34 19.994,24.65 21,23.644 21,21.265 20.75,21.015 v1(20.75,18.5)
  Bottom Layer w0.2: v1(20.75,18.5) 24.048,15.202 24.048,14.702 27.25,11.5 30.627,11.5 31.675,10.452 R13.1
LED_B: R11.1 U2.9 | length 13.8
  Top Layer w0.2: v1(11.25,18) 11.25,18.111 10.75,18.611 10.75,25.547 11.053,25.85 U2.9
  Bottom Layer w0.2: R11.1 9.175,15.925 v1(11.25,18)
LED_G: R10.1 U2.8 | length 16.5
  Top Layer w0.2: v1(11.25,17) 10.25,18 10.25,25.5 11,26.25 U2.8
  Bottom Layer w0.2: R10.1 9.725,12.75 10.5,13.525 10.5,16.25 v1(11.25,17)
LED_R: R9.1 U2.7 | length 19.4
  Top Layer w0.2: v1(11.25,16) 9.75,17.5 9.75,25.703 10.697,26.65 U2.7
  Bottom Layer w0.2: R9.1 10.5,11.25 11.25,12 v1(11.25,16)
NetC2_2: C2.2 R1.1 Y1.3 | length 3.3
  Top Layer w0.23: Y1.3 16.2,16.175 C2.2 R1.1
NetD1_1: D1.1 R7.2 | length 4.3
  Top Layer w0.2: D1.1 3.675,8.075 3.675,10.925 v1(3.75,11)
  Bottom Layer w0.2: v1(3.75,11) 3.75,9.825 R7.2
NetD2_1: D2.1 R9.2 | length 4.2
  Top Layer w0.2: D2.1 4.365,11.885 5,11.25 v1@6.568,11.25
  Bottom Layer w0.2: v1@6.568,11.25 R9.2
  other v1: 6.5,11.25
NetD2_3: D2.3 R11.2 | length 3.2
  Top Layer w0.2: D2.3 6.174,14.154 6.472,14.154 v1@6.568,14.25
  Bottom Layer w0.2: v1@6.568,14.25 R11.2
  other v1: 6.5,14.25
NetD2_4: D2.4 R10.2 | length 2.9
  Top Layer w0.2: D2.4 6.082,12.345 6.487,12.75 v1@6.568,12.75
  Bottom Layer w0.2: v1@6.568,12.75 R10.2
  other v1: 6.5,12.75
NetD3_1: D3.1 R8.2 | length 4.3
  Top Layer w0.2: D3.1 12.425,7.825 12.425,10.675 v1(12.5,10.75)
  Bottom Layer w0.2: v1(12.5,10.75) 12.5,9.575 R8.2
NetD4_1: D4.1 R12.2 | length 4.3
  Top Layer w0.2: D4.1 21.425,7.825 21.425,10.675 v1(21.5,10.75)
  Bottom Layer w0.2: v1(21.5,10.75) 21.5,9.575 R12.2
NetD5_1: D5.1 R13.2 | length 4.3
  Top Layer w0.2: D5.1 30.175,7.825 30.175,10.675 v1(30.25,10.75)
  Bottom Layer w0.2: v1(30.25,10.75) 30.25,9.575 R13.2
NetD6_1: D6.1 R14.2 | length 2.4
  Top Layer w0.2: D6.1 v1(6.5,17.5)
  Bottom Layer w0.2: v1(6.5,17.5) R14.2
NetR2_2: R2.2 S1.2 | length 8.1
  Top Layer w0.2: S1.2@8.825,27 8.825,22.5 8.825,21.31 9,21.135 v1(9,21)
  Bottom Layer w0.2: R2.2 9,22.925 v1(9,21)
QSPI_SCLK: M1.6 U2.56 | length 7.6
  Top Layer w0.23: v1(13.5,34.75) 13.5,32.831 14.3,32.031 U2.56
  Bottom Layer w0.23: M1.6 11.358,34.692 13.442,34.692 v1(13.5,34.75)
QSPI_SD0: M1.5 U2.57 | length 6.5
  Top Layer w0.23: v1(12.75,35.75) 12.75,32.75 13.9,31.6 U2.57
QSPI_SD1: M1.2 U2.59 | length 16.5
  Top Layer w0.23: v1(1.5,32.25) 1.59,32.16 1.84,32.16 2.623,31.377 12.627,31.377 13.1,30.904 U2.59
  Bottom Layer w0.23: v1(1.5,32.25) 2.615,33.365 M1.2
QSPI_SD2: M1.3 U2.58 | length 17.5
  Top Layer w0.23: v1(1.5,33.5) 3.25,31.75 12.75,31.75 13.5,31 U2.58
  Bottom Layer w0.23: v1(1.5,33.5) 2.635,34.635 M1.3
QSPI_SD3: M1.7 U2.55 | length 7
  Top Layer w0.2: v1(14.25,33.5) 14.25,32.66 14.7,32.21 U2.55
  Bottom Layer w0.23: M1.7 11.368,33.432 14.182,33.432 v1(14.25,33.5)
QSPI_SS: M1.1 R6.1 U2.60 | length 18.7
  Top Layer w0.23: v1(1.5,31) 12.5,31 12.7,30.8 U2.60
  Bottom Layer w0.23: R6.1 3.465,28.96 3.465,29.035 v1(1.5,31) 2.595,32.095 M1.1
RP2350_D_N: R4.1 X1.2 | length 31.1
  Top Layer w0.23: R4.1 cw(c16.9,37.075) 16.25,37.075 16.25,37.5 cw(c17.75,37.5) 17.75,39 25,39 cw(c25,37.75) 26.25,37.75 26.25,33 cw(c25.357,33) 25.357,32.107 24.5,32.107 ccw(c24.5,30.675) 23.068,30.675 23.068,25.9 ccw(c24.046,25.9) 24.046,24.921 26.199,24.921 cw(c26.199,24.7) X1.2
RP2350_D_P: R3.1 X1.3 | length 31.6
  Top Layer w0.23: R3.1 ccw(c15.4,36.918) 15.893,36.918 15.893,37.5 cw(c17.75,37.5) 17.75,39.357 25,39.357 cw(c25,37.75) 26.607,37.75 26.607,33 cw(c25.357,33) 25.357,31.75 24.5,31.75 ccw(c24.5,30.675) 23.425,30.675 23.425,25.9 ccw(c24.046,25.9) 24.046,25.279 26.199,25.279 ccw(c26.199,25.5) X1.3
RP2350_DX_N: R4.2 U2.51 | length 5.8
  Top Layer w0.23: U2.51 cw(c16.3,29.711) 16.279,29.711 16.279,34.454 cw(c16.9,34.454) R4.2
RP2350_DX_P: R3.2 U2.52 | length 5.7
  Top Layer w0.23: R3.2 cw(c15.4,34.554) 15.921,34.554 15.921,29.711 cw(c15.9,29.711) U2.52
RUN: S1.1 U2.26 | length 22.5
  Top Layer w0.2: v1(6.5,21) 6.5,21.135 6.675,21.31 6.675,22.5 S1.1@6.675,27
  Top Layer w0.23: U2.26 16.7,21.786 17.236,21.25 v1(17.25,21.25)
  Bottom Layer w0.23: v1(6.5,21) 6.5,23.5 7,24 10.25,24 11.25,23 15.5,23 v1(17.25,21.25)
Thermistor_0: R15.2 U2.40 X2.2 | length 38.4
  Top Layer w0.2: X2.2 5.749,3.999 5.749,4.499 7,5.75 14.5,5.75 21.5,12.75 21.5,26.047 20.497,27.05 U2.40
  Bottom Layer w0.2: R15.2 5.175,3.073 5.5,3.398 X2.2
Thermistor_1: R16.2 U2.41 X3.2 | length 31.1
  Top Layer w0.2: X3.2 14.25,4.75 21.75,12.25 21.75,12.547 21.82,12.617 21.82,26.18 20.55,27.45 U2.41
  Bottom Layer w0.2: R16.2 13.925,3.073 14.25,3.398 X3.2
Thermistor_2: R17.2 U2.42 X4.2 | length 30.5
  Top Layer w0.2: U2.42 20.739,27.85 22.14,26.449 22.14,12.86 25,10 25,5.5 X4.2
  Bottom Layer w0.2: R17.2 22.925,3.073 23.25,3.398 X4.2
Thermistor_3: R18.2 U2.43 X5.2 | length 33.3
  Top Layer w0.2: U2.43 21,28.25 22.5,26.75 22.5,13.25 X5.2
  Bottom Layer w0.2: R18.2 31.675,3.073 32,3.398 X5.2
U\S\B\_\B\O\O\T\: R6.2 S2.1 | length 9
  Top Layer w0.2: S2.1@1.925,22.5 S2.1@1.925,26.85 ; S2.1@1.925,27 S2.1@1.925,26.85 ; v1(3,26) 2.904,26.096 2.679,26.096 S2.1@1.925,26.85
  Bottom Layer w0.2: R6.2 2.325,26.675 v1(3,26)
VREG_AVDD: R5.2 U2.46 | length 9.5
  Top Layer w0.2: U2.46 18.3,30.8 18.75,31.25 22.25,31.25 v1(24,33)
  Bottom Layer w0.2: v1(24,33) 24.831,33.831 24.831,34.156 R5.2
VREG_LX: L2.2 U2.48 | length 7.8
  Top Layer w0.2: U2.48 17.5,31.25 18.18,31.93 20.43,31.93 v1(21.5,33)
  Bottom Layer w0.2: v1(21.5,33) L2.2
XIN: C1.2 U2.21 Y1.1 | length 6.5
  Top Layer w0.23: C1.2 14.101,18.675 Y1.1 14.7,18.725 U2.21
XOUT: R1.2 U2.22 | length 5.6
  Top Layer w0.23: U2.22 15.1,20.9 16,20 16.925,20 17.765,19.16 17.765,19.135 17.975,18.925 R1.2
pads on no net: U2.2 U2.3 U2.4 U2.5 U2.10 U2.12 U2.13 U2.14 U2.15 U2.16 U2.17 U2.18 U2.19 U2.24 U2.25 U2.27 U2.28 U2.29 U2.35 U2.36 U2.37 V1.8 X1.4
copper on no net:
  other v1: 24.6,16.75

## Polygon pours and split planes (outlines as drawn)
+3V3 on Power Layer "+3V3 Power Poly" (solid, remove dead copper, shelved, pour order 3): 0,0 35.5,0 35.5,40.5 0,40.5
+1V1 on Power Layer "+1V1 Power Poly" (solid, remove dead copper, shelved, pour order 1): 11.5,30.25 19.5,30.25 19.5,22.2 18.5,22.2 18.5,29.25 12.5,29.25 12.5,22.2 11.5,22.2
Earth on Power Layer "Earth Power Poly" (solid, remove dead copper, shelved, pour order 0): 32,40.5 35.5,40.5 35.5,0 32,0
GND on Ground Layer "meow" (solid, remove dead copper, shelved, pour order 2): 0,0 0,40.5 35.5,40.5 35.5,0
GND on Bottom Layer "GND Bottom Poly" (hatched 45Degree grid 0.508 track 0.203, remove dead copper, shelved, pour order 5): 0,0 35.5,0 35.5,40.5 0,40.5
GND on Top Layer "GND Top Poly" (hatched 45Degree grid 0.508 track 0.203, remove dead copper, shelved, pour order 4): 0,0 35.5,0 35.5,40.5 0,40.5

## Keep-outs
Keep-Out Layer:
  the board outline again, w0.2

## Other copper
Top Layer:
  pour cut-out: 18.5,19.5 18.5,14.25 12,14.25 12,19.5

## Silkscreen, mask and mechanical layers (free items; w line width, h text height)
Poly Planning:
  lines w0.1: 11.5,22.2 12.5,22.2 12.5,29.25 18.5,29.25 18.5,22.2 19.5,22.2 19.5,30.25 11.5,30.25 11.5,22.2
  lines w0.2: 32,0 35.5,0 35.5,40.5 32,40.5 32,0